# EAGLE board INKTIME_PCB (EAGLE 9.7.0)
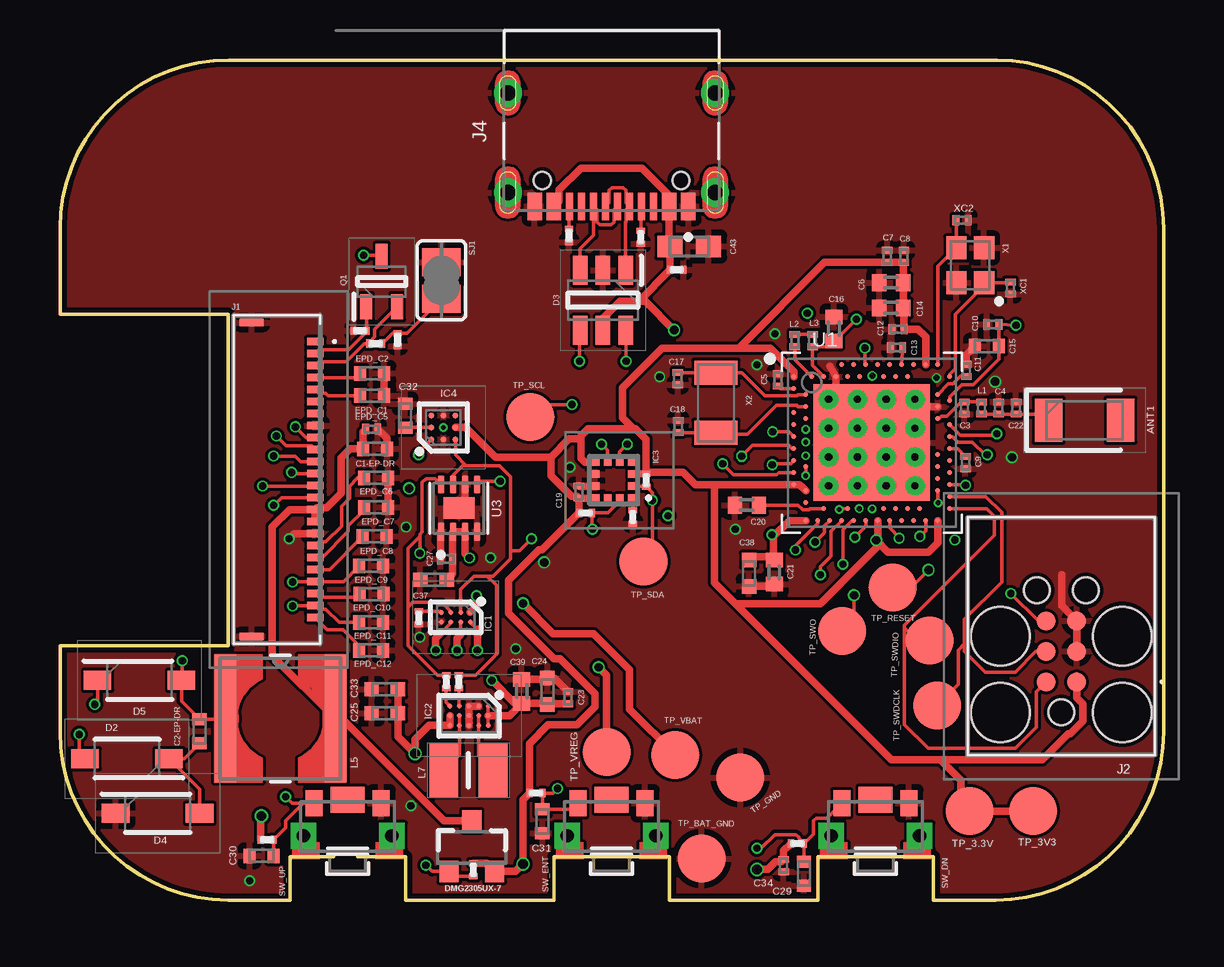
[diagram p0: board, top side]
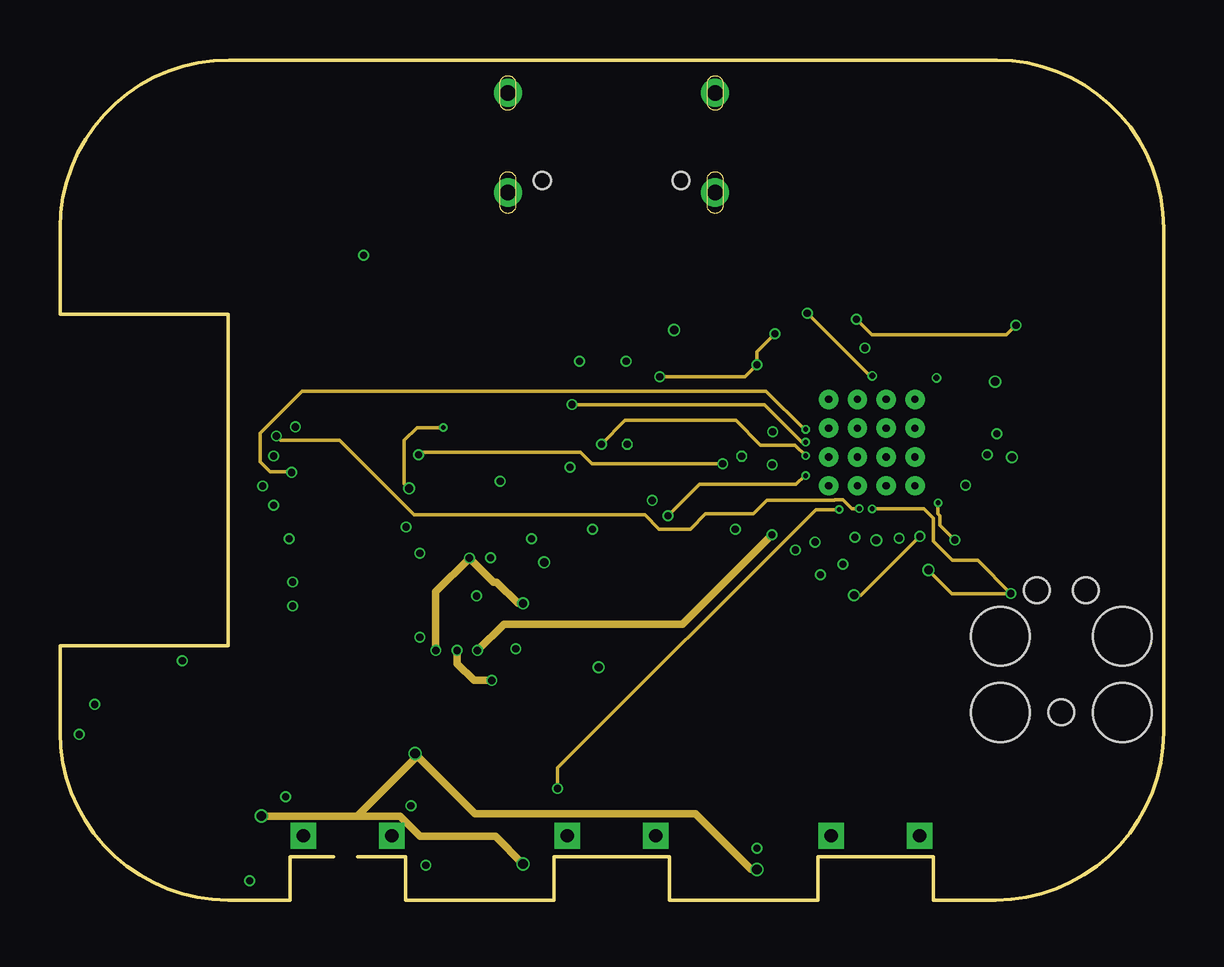
[diagram p1: board, inner layer Route2]
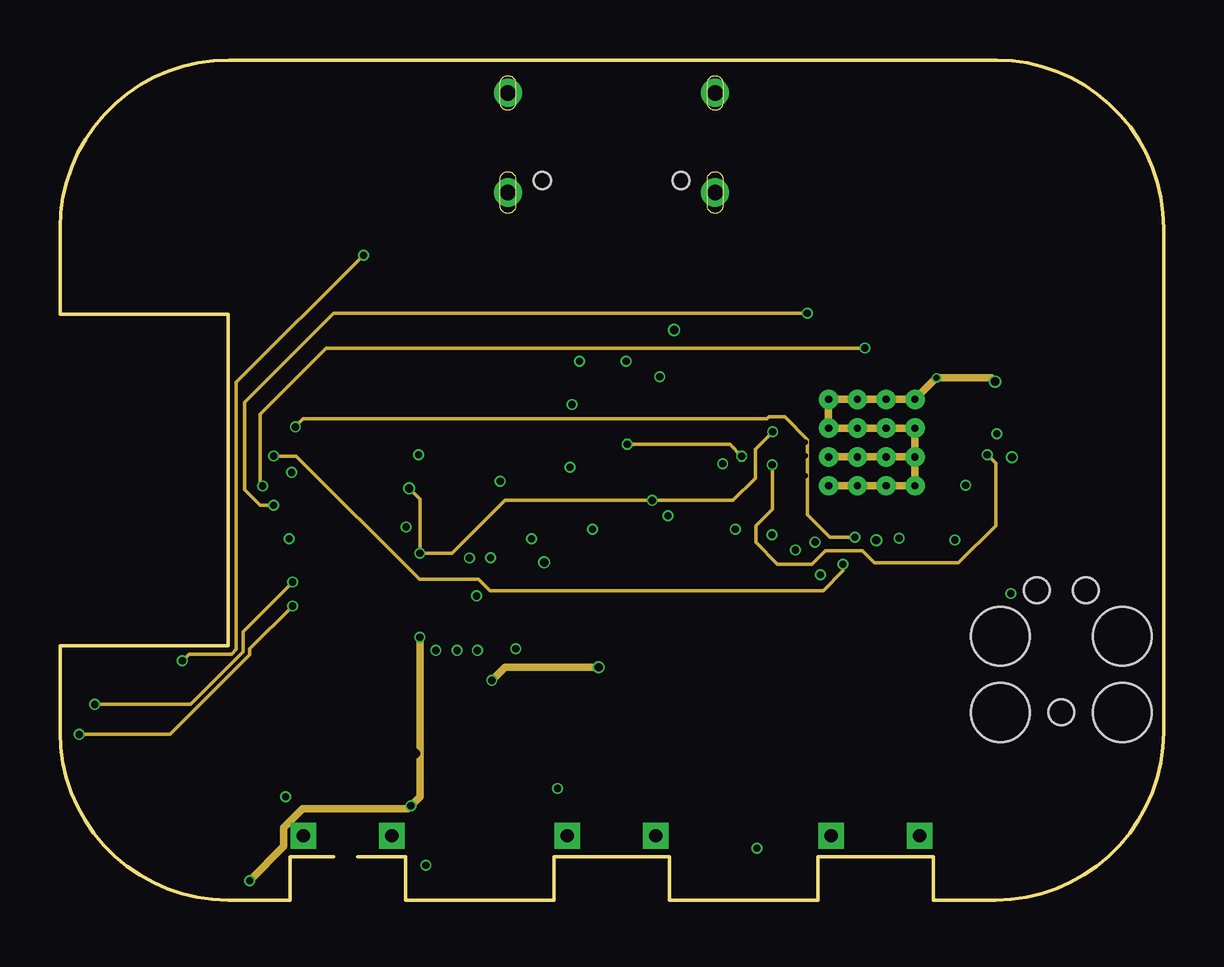
[diagram p2: board, inner layer Route15]
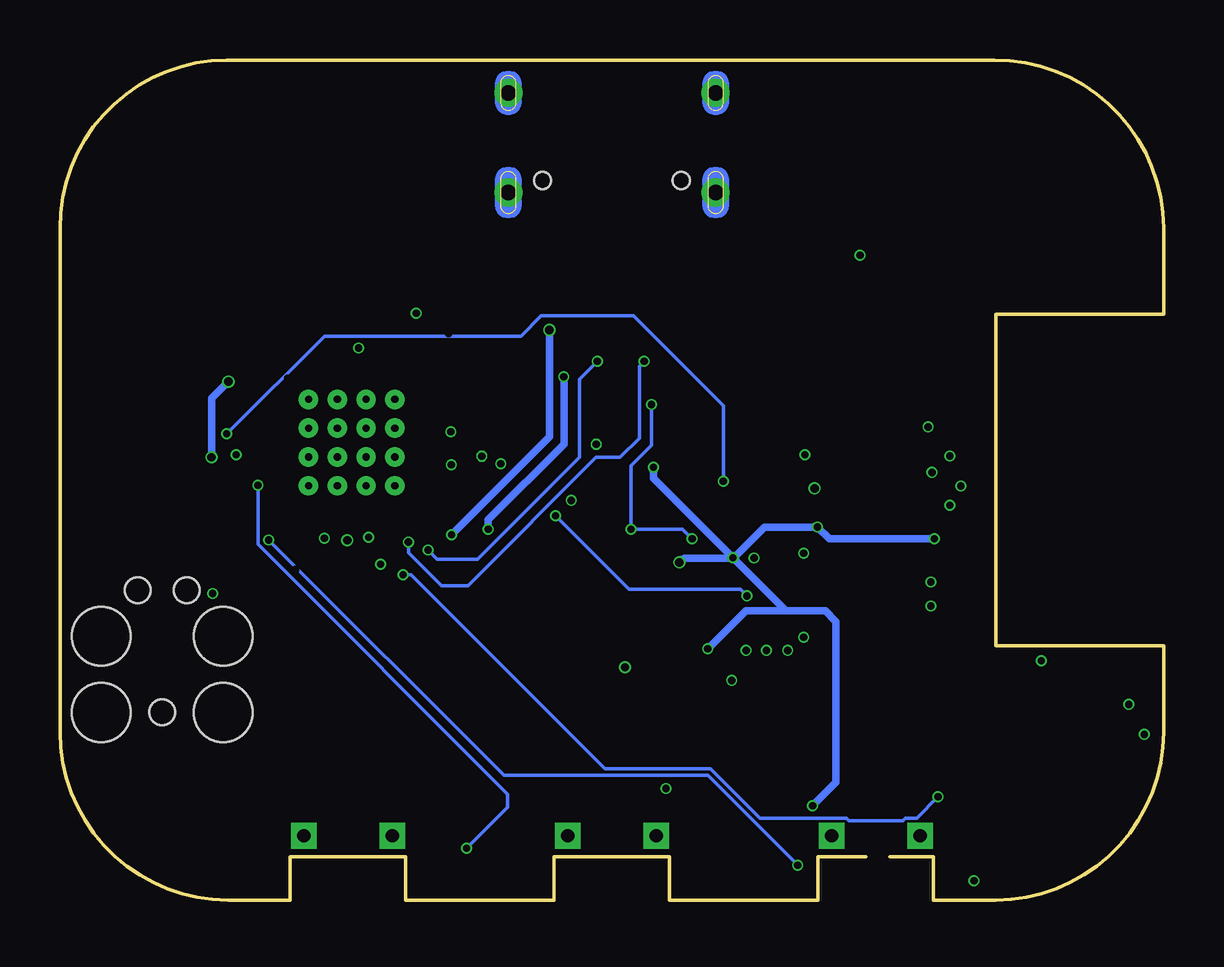
[diagram p3: board, bottom side, seen from below]

Size 46 x 35 mm. Coordinates in mm from the lower left corner, seen from the top.
Outline: 39,0 36.4,0 36.4,1.8 31.6,1.8 31.6,0 25.4,0 25.4,1.8 20.6,1.8 20.6,0 14.4,0 14.4,1.8 9.6,1.8 9.6,0 7,0 arc-90 0,7 0,10.6 7,10.6 7,24.4 0,24.4 0,28 arc-90 7.05,35 39.05,35 arc-90 46,28 46,7 arc-90 39,0
Copper layers (([2:1+(2*15)+16])): Top 0.035mm / dielectric 1.6mm / Route2 0.035mm / dielectric 0.15mm / Route15 0.035mm / dielectric 0.2mm / Bottom 0.035mm
Design rules "jlcpcb-2layers *": minimum track width 5mil, minimum drill 0.3mm, track to track 5mil, track to pad 5mil, pad to pad 5mil, via to via 5mil, smd to smd 5mil, copper to edge 0.2mm, drill to drill 6mil, minimum pad ring 10mil, minimum via ring 3mil, stop-mask expansion 4mil, vias tented up to drill 0mil, thermal gap 10mil

## Footprints (pad centres in the part's own frame; a part is rotated, then mirrored left to right if it is on the bottom)
2450AT18B100E_ANTC3216X140N = smd 1.15 x 1.8: 1 -1.5,0; 2 1.5,0
NORDIC_NRF_3_RESC0402_L = smd 0.5 x 0.6: 1 -0.5,0; 2 0.5,0
NORDIC_NRF_3_RESC0201_L = smd 0.28 x 0.43: 1 -0.255,0; 2 0.255,0
PERFECT_0402_0402 = smd 0.6 x 0.7: 1 -0.5,0; 2 0.5,0
NORDIC_NRF_3_RESC0402_N = smd 0.6 x 0.6: 1 -0.55,0; 2 0.55,0
GRM011R60J152KE01L_1_0201 = smd 0.35 x 0.25: 1 0,0.275; 2 0,-0.275
NORDIC_NRF_3_RESC0603_N = smd 1.05 x 0.9: 1 -0.8,0; 2 0.8,0
ESP32_C6_LIBRARY_5_SOD3716X135N = smd 1.15 x 0.8: 1 -1.75,0; 2 1.75,0
ESP32_C6_LIBRARY_3_SOT95P280X145-6N = smd 1.2 x 0.6: 1 -1.25,0.95; 2 -1.25,0; 3 -1.25,-0.95; 4 1.25,-0.95; 5 1.25,0; 6 1.25,0.95
ESP32_C6_LIBRARY_4_ESP32_C6_LIBRARY_4_ESP32_C6_LIBRARY_4_ESP32_C6_LIBRARY_4_ESP32_WROVER_SPARKFUN-DISCRETESEMI_SOT23-3 = smd 0.8 x 0.9: 1 -0.95,-1; 2 0.95,-1; 3 0,1.1
BQ25180YBGR_BGA8C40P2X4_100X155X50 = smd 0.2 x 0.2: A1 -0.2,0.6; A2 0.2,0.6; B1 -0.2,0.2; B2 0.2,0.2; C1 -0.2,-0.2; C2 0.2,-0.2; D1 -0.2,-0.6; D2 0.2,-0.6
RT6160AWSC_BGA15C40P3X5_140X230X60 = smd 0.216 x 0.216: A1 -0.4,0.8; A2 0,0.8; A3 0.4,0.8; B1 -0.4,0.4; B2 0,0.4; B3 0.4,0.4; C1 -0.4,0; C2 0,0; C3 0.4,0; D1 -0.4,-0.4; D2 0,-0.4; D3 0.4,-0.4; E1 -0.4,-0.8; E2 0,-0.8; E3 0.4,-0.8
BMA423_BMA423 = smd 0.3 x 0.35: 1 -0.75,-0.775; 2 -0.25,-0.775; 3 0.25,-0.775; 4 0.75,-0.775; 7 0.75,0.775; 8 0.25,0.775; 9 -0.25,0.775; 10 -0.75,0.775 | smd 0.35 x 0.3: 5 0.775,-0.25; 6 0.775,0.25; 11 -0.775,0.25; 12 -0.775,-0.25
DRV2605YZFR_BGA9C50P3X3_144X144X62 = smd 0.25 x 0.25: A1 -0.5,0.5; A2 0,0.5; A3 0.5,0.5; B1 -0.5,0; B2 0,0; B3 0.5,0; C1 -0.5,-0.5; C2 0,-0.5; C3 0.5,-0.5
503480-2400_5034802400 = smd 0.3 x 0.7: 1 -5.75,1.525; 2 -5.25,1.525; 3 -4.75,1.525; 4 -4.25,1.525; 5 -3.75,1.525; 6 -3.25,1.525; 7 -2.75,1.525; 8 -2.25,1.525; 9 -1.75,1.525; 10 -1.25,1.525; 11 -0.75,1.525; 12 -0.25,1.525; 13 0.25,1.525; 14 0.75,1.525; 15 1.25,1.525; 16 1.75,1.525; 17 2.25,1.525; 18 2.75,1.525; 19 3.25,1.525; 20 3.75,1.525; 21 4.25,1.525; 22 4.75,1.525; 23 5.25,1.525; 24 5.75,1.525 | smd 0.3 x 1: MP1 -6.54,-1.125; MP2 6.54,-1.125
TC2030-IDC_TC2030IDC = smd 0.783 x 0.783: 1 -0.953,-0.635; 2 -0.953,0.635; 3 0.317,-0.635; 4 0.317,0.635; 5 1.588,-0.635; 6 1.588,0.635 | hole 2.451: -2.223,-2.54; -2.223,2.54; 0.952,-2.54; 0.952,2.54 | hole 1.067: -2.223,0; 2.857,-1.016; 2.857,1.016
KH-TYPE-C-16P_KINGHELM_KH-TYPE-C-16P = smd 0.6 x 1.15: A1_B12 -3.2,4.725; A4_B9 -2.4,4.725; A9_B4 2.4,4.725; A12_B1 3.2,4.725 | smd 0.3 x 1.15: A5 -1.25,4.725; A6 -0.25,4.725; A7 0.25,4.725; A8 1.25,4.725; B5 1.75,4.725; B6 0.75,4.725; B7 -0.75,4.725; B8 -1.75,4.725 | drill 0.65 pad 1.05: SH1 -4.32,0; SH2 4.32,0; SH3 -4.32,4.15; SH4 4.32,4.15 | hole 0.7: -2.89,3.65; 2.89,3.65
NORDIC_NRF_2_RESC0201_L = smd 0.28 x 0.43: 1 -0.255,0; 2 0.255,0
ESP32_C6_LIBRARY_2_IND_4828-WE-TPC_WRE = smd 0.9 x 5.3: 1 -2.286,0; 2 2.286,0
MLP2016SR47MT0S1_INDC2016X100N = smd 1.2 x 2.2: 1 -1.028,0; 2 1.028,0
ESP32_C6_LIBRARY_6_SOT65P210X110-3N = smd 1.05 x 0.5: 1 -1.05,0.65; 2 -1.05,-0.65; 3 1.05,0
CPF0201D7K68C1_0201 = smd 0.35 x 0.25: 1 0,0.275; 2 0,-0.275
ESP32_C6_LIBRARY_7_JUMPER_SJ = smd 1.168 x 1.6: 1 -0.762,0; 2 0.762,0
2025-10-22_07-23-44_LIBRARY_SW_EVP-AKE31A_PAN = smd 0.711 x 1.092: 1 -1.4,-0.972; 2 1.4,-0.972 | drill 0.559 pad 0.914 square: 3 -1.848,0.381; 4 1.848,0.381 | smd 1.397 x 1.092: 5 0,-1.124
HECTOR_WATCH_1_TP20R = smd 2 x 2: TP 0,0
NORDIC_NRF_4_AQFN50P700X700X85_HS-74N = smd 4.85 x 4.85: P$74 0,0 | drill 0.3 pad 0.6: P$75 -1.8,1.8; P$76 -0.6,1.8; P$77 0.6,1.8; P$78 1.8,1.8; P$79 -1.8,0.6; P$80 -0.6,0.6; P$81 0.6,0.6; P$82 1.8,0.6; P$83 -1.8,-0.6; P$84 -0.6,-0.6; P$85 0.6,-0.6; P$86 1.8,-0.6; P$87 -1.8,-1.8; P$88 -0.6,-1.8; P$89 0.6,-1.8; P$90 1.8,-1.8 | smd 0.2 x 0.2: P$A8 -1.25,3.25; P$A10 -0.75,3.25; P$A12 -0.25,3.25; P$A14 0.25,3.25; P$A16 0.75,3.25; P$A18 1.25,3.25; P$A20 1.75,3.25; P$A22 2.25,3.25; P$A23 2.75,3.25; P$AA24 3.25,-2.25; P$AB2 -2.75,-2.5; P$AC5 -2,-2.75; P$AC9 -1,-2.75; P$AC11 -0.5,-2.75; P$AC13 0,-2.75; P$AC15 0.5,-2.75; P$AC17 1,-2.75; P$AC19 1.5,-2.75; P$AC21 2,-2.75; P$AC24 3.25,-2.75; P$AD2 -2.75,-3.25; P$AD4 -2.25,-3.25; P$AD6 -1.75,-3.25; P$AD8 -1.25,-3.25; P$AD10 -0.75,-3.25; P$AD12 -0.25,-3.25; P$AD14 0.25,-3.25; P$AD16 0.75,-3.25; P$AD18 1.25,-3.25; P$AD20 1.75,-3.25; P$AD22 2.25,-3.25; P$AD23 2.75,-3.25; P$B1 -3.25,2.75; P$B3 -2.5,2.75; P$B5 -2,2.75; P$B7 -1.5,2.75; P$B9 -1,2.75; P$B11 -0.5,2.75; P$B13 0,2.75; P$B15 0.5,2.75; P$B17 1,2.75; P$B19 1.5,2.75; P$B24 3.25,2.75; P$C1 -3.25,2.25; P$D2 -2.75,2; P$D23 2.75,2; P$E24 3.25,1.75; P$F2 -2.75,1.5; P$F23 2.75,1.5; P$G1 -3.25,1.25; P$H2 -2.75,1; P$H23 2.75,1; P$J1 -3.25,0.75; P$J24 3.25,0.75; P$K2 -2.75,0.5; P$L1 -3.25,0.25; P$L24 3.25,0.25; P$M2 -2.75,0; P$N1 -3.25,-0.25; P$N24 3.25,-0.25; P$P2 -2.75,-0.5; P$P23 2.75,-0.5; P$R1 -3.25,-0.75; P$R24 3.25,-0.75; P$T2 -2.75,-1; P$T23 2.75,-1; P$U1 -3.25,-1.25; P$U24 3.25,-1.25; P$V23 2.75,-1.5; P$W1 -3.25,-1.75; P$W24 3.25,-1.75; P$Y2 -2.75,-2; P$Y23 2.75,-2
ESP32_C6_LIBRARY_SON50P200X200X80-9N = smd 0.76 x 0.27: 1 -0.985,0.75; 2 -0.985,0.25; 3 -0.985,-0.25; 4 -0.985,-0.75; 5 0.985,-0.75; 6 0.985,-0.25; 7 0.985,0.25; 8 0.985,0.75 | smd 0.9 x 1.3: 9 0,0
NORDIC_NRF_BT-XTAL_2016_N = smd 0.95 x 0.85: 1 -0.725,-0.575; 2 0.725,-0.575; 3 0.725,0.575; 4 -0.725,0.575
NORDIC_NRF_1_XTAL_3215_N = smd 1 x 1.8: 1 -1.25,0; 2 1.25,0

## Placement (x,y rotation side)
ANT1  2450AT18B100E  [2450AT18B100E_ANTC3216X140N]  42.71,19.99 0 top
C1-EP-DR  10uF  [NORDIC_NRF_3_RESC0402_L]  13.13,18.8 180 top
C2-EP-DR  4.7uF/25V  [NORDIC_NRF_3_RESC0402_L]  5.82,7.03 270 top
C3  1pF  [NORDIC_NRF_3_RESC0201_L]  37.7,20.5 270 top
C4  1pF  [NORDIC_NRF_3_RESC0201_L]  39.12,20.5 90 top
C5  100nF  [NORDIC_NRF_3_RESC0201_L]  29.93,21.67 90 top
C6  4.7uF  [PERFECT_0402_0402]  34.65,25.72 180 top
C7  100nF  [NORDIC_NRF_3_RESC0201_L]  34.48,26.82 90 top
C8  100nF  [NORDIC_NRF_3_RESC0201_L]  35.18,26.82 90 top
C9  820pF  [NORDIC_NRF_3_RESC0201_L]  37.75,18.22 270 top
C10  N.C.  [NORDIC_NRF_3_RESC0201_L]  38.88,23.98 180 top
C11  100pF  [NORDIC_NRF_3_RESC0201_L]  37.78,22.07 90 top
C12  100nF  [NORDIC_NRF_3_RESC0201_L]  34.93,23.78 180 top
C13  N.C.  [NORDIC_NRF_3_RESC0201_L]  34.87,23.02 180 top
C14  4.7uF  [PERFECT_0402_0402]  34.65,24.67 180 top
C15  1uF  [NORDIC_NRF_3_RESC0402_L]  38.64,23.08 180 top
C16  47nF  [PERFECT_0402_0402]  32.26,23.8 90 top
C17  12pF  [NORDIC_NRF_3_RESC0201_L]  25.75,21.72 90 top
C18  12pF  [NORDIC_NRF_3_RESC0201_L]  25.77,19.73 270 top
C19  100nF  [NORDIC_NRF_3_RESC0201_L]  21.63,17 90 top
C20  4.7uF  [PERFECT_0402_0402]  28.63,16.45 180 top
C21  4.7uF  [PERFECT_0402_0402]  29.78,13.66 270 top
C22  N.C.  [NORDIC_NRF_3_RESC0201_L]  39.85,20.5 90 top
C23  0.1uF  [NORDIC_NRF_3_RESC0201_L]  21.18,8.43 270 top
C24  10uF  [NORDIC_NRF_3_RESC0402_N]  20.32,8.7 270 top
C25  22uF  [NORDIC_NRF_3_RESC0402_N]  13.54,7.78 180 top
C27  0.1uF  [NORDIC_NRF_3_RESC0201_L]  16.11,14.21 0 top
C29  1uF  [NORDIC_NRF_3_RESC0402_L]  31.01,1.09 90 top
C30  1uF  [NORDIC_NRF_3_RESC0402_L]  8.4,1.84 0 top
C31  1uF  [NORDIC_NRF_3_RESC0402_L]  20.11,3.28 90 top
C32  1uF  [NORDIC_NRF_3_RESC0402_L]  14.39,20.18 270 top
C33  22uF  [NORDIC_NRF_3_RESC0402_N]  13.54,8.78 180 top
C34  0.1uF  [NORDIC_NRF_3_RESC0201_L]  30.16,1.43 90 top
C37  1uF  [NORDIC_NRF_3_RESC0402_N]  15.57,13.34 0 top
C38  1uF  [NORDIC_NRF_3_RESC0402_N]  28.72,13.62 90 top
C39  10uF  [PERFECT_0402_0402]  19.24,8.69 90 top
C42  0.1uF  [GRM011R60J152KE01L_1_0201]  25.71,26.26 90 top
C43  4.7uF  [NORDIC_NRF_3_RESC0603_N]  26.23,27.23 0 top
D2  MBR0530  [ESP32_C6_LIBRARY_5_SOD3716X135N]  2.8,5.89 180 top
D3  USBLC6-2SC6Y  [ESP32_C6_LIBRARY_3_SOT95P280X145-6N]  22.63,24.99 270 top
D4  MBR0530  [ESP32_C6_LIBRARY_5_SOD3716X135N]  4.07,3.61 0 top
D5  MBR0530  [ESP32_C6_LIBRARY_5_SOD3716X135N]  3.32,9.16 0 top
DMG2305UX-7  20V/4.2A/52mΩ/1.4W  [ESP32_C6_LIBRARY_4_ESP32_C6_LIBRARY_4_ESP32_C6_LIBRARY_4_ESP32_C6_LIBRARY_4_ESP32_WROVER_SPARKFUN-DISCRETESEMI_SOT23-3]  17.17,2.19 0 top
EPD_C1  1uF/50V  [NORDIC_NRF_3_RESC0402_L]  13.02,21.02 180 top
EPD_C2  1uF/50V  [NORDIC_NRF_3_RESC0402_L]  13.02,21.94 180 top
EPD_C5  0.1uF/50V  [NORDIC_NRF_3_RESC0201_L]  12.99,19.62 180 top
EPD_C6  1uF/50V  [NORDIC_NRF_3_RESC0402_L]  13.17,17.59 180 top
EPD_C7  1uF/50V  [NORDIC_NRF_3_RESC0402_L]  13.17,16.36 180 top
EPD_C8  1uF/50V  [NORDIC_NRF_3_RESC0402_L]  13.12,15.15 180 top
EPD_C9  1uF/50V  [NORDIC_NRF_3_RESC0402_L]  12.97,13.92 180 top
EPD_C10  1uF/50V  [NORDIC_NRF_3_RESC0402_L]  12.98,12.75 180 top
EPD_C11  1uF/50V  [NORDIC_NRF_3_RESC0402_L]  12.97,11.57 180 top
EPD_C12  1uF/50V  [NORDIC_NRF_3_RESC0402_L]  12.97,10.4 180 top
IC1  BQ25180YBGR  [BQ25180YBGR_BGA8C40P2X4_100X155X50]  16.5,11.78 270 top
IC2  RT6160AWSC  [RT6160AWSC_BGA15C40P3X5_140X230X60]  17.05,7.68 270 top
IC3  BMA423  [BMA423_BMA423]  23.08,17.5 90 top
IC4  DRV2605YZFR  [DRV2605YZFR_BGA9C50P3X3_144X144X62]  15.98,19.69 90 top
J1  503480-2400  [503480-2400_5034802400]  9.12,17.52 270 top
J2  TC2030-IDC  [TC2030-IDC_TC2030IDC]  41.74,10.04 90 top
J4  KH-TYPE-C-16P  [KH-TYPE-C-16P_KINGHELM_KH-TYPE-C-16P]  22.99,33.63 180 top
L1  3.9nH  [NORDIC_NRF_2_RESC0201_L]  38.41,20.5 270 top
L2  10uH  [NORDIC_NRF_2_RESC0201_L]  30.63,23.31 90 top
L3  15nH  [NORDIC_NRF_2_RESC0201_L]  31.37,23.31 270 top
L5  68uH  [ESP32_C6_LIBRARY_2_IND_4828-WE-TPC_WRE]  9.19,7.56 0 top
L7  FTC252012SR47MBCA  [MLP2016SR47MT0S1_INDC2016X100N]  17.03,5.4 180 top
Q1  SI1308EDL-T1-GE3  [ESP32_C6_LIBRARY_6_SOT65P210X110-3N]  13.41,25.77 90 top
R1  0  [CPF0201D7K68C1_0201]  23.88,15.96 180 top
R1_EP_DR  0.47  [CPF0201D7K68C1_0201]  13.15,23.18 270 top
R1_USB  5K1  [CPF0201D7K68C1_0201]  24.21,27.61 180 top
R2  0  [CPF0201D7K68C1_0201]  16.1,9.09 0 top
R2_EP_DR  10K  [CPF0201D7K68C1_0201]  12.51,23.72 90 top
R2_USB  5K1  [CPF0201D7K68C1_0201]  21.22,27.69 0 top
R4  0  [CPF0201D7K68C1_0201]  16.63,9.09 0 top
R5  10K  [CPF0201D7K68C1_0201]  8.64,2.51 270 top
R7  10K  [CPF0201D7K68C1_0201]  30.74,2.35 270 top
R8  10K  [CPF0201D7K68C1_0201]  19.84,4.45 270 top
R9  10K  [CPF0201D7K68C1_0201]  14.96,11.76 180 top
R17  3K3  [CPF0201D7K68C1_0201]  21.91,16.13 90 top
R18  3K3  [CPF0201D7K68C1_0201]  24.44,17.49 0 top
R_PWR_EPD  10K  [CPF0201D7K68C1_0201]  17.23,1.26 180 top
R_TYPE_SEL  2.2  [CPF0201D7K68C1_0201]  14.07,23.35 180 top
SJ1  0  [ESP32_C6_LIBRARY_7_JUMPER_SJ]  15.9,25.82 270 top
SW_DN  2025-10-22_07-23-44_LIBRARY_EVP-AKE31ASW_EVP-AKE31A_PAN  [2025-10-22_07-23-44_LIBRARY_SW_EVP-AKE31A_PAN]  33.99,3.06 180 top
SW_ENT  2025-10-22_07-23-44_LIBRARY_EVP-AKE31ASW_EVP-AKE31A_PAN  [2025-10-22_07-23-44_LIBRARY_SW_EVP-AKE31A_PAN]  22.99,3.06 180 top
SW_UP  2025-10-22_07-23-44_LIBRARY_EVP-AKE31ASW_EVP-AKE31A_PAN  [2025-10-22_07-23-44_LIBRARY_SW_EVP-AKE31A_PAN]  11.99,3.06 180 top
TP_3.3V  HECTOR_WATCH_1_TPTP20R  [HECTOR_WATCH_1_TP20R]  37.91,3.7 0 top
TP_3V3  HECTOR_WATCH_1_TPTP20R  [HECTOR_WATCH_1_TP20R]  40.57,3.71 0 top
TP_BAT_GND  HECTOR_WATCH_1_TPTP20R  [HECTOR_WATCH_1_TP20R]  26.74,1.72 90 top
TP_GND  HECTOR_WATCH_1_TPTP20R  [HECTOR_WATCH_1_TP20R]  28.36,5.1 0 top
TP_RESET  HECTOR_WATCH_1_TPTP20R  [HECTOR_WATCH_1_TP20R]  34.7,13.02 0 top
TP_SCL  HECTOR_WATCH_1_TPTP20R  [HECTOR_WATCH_1_TP20R]  19.61,20.13 0 top
TP_SDA  HECTOR_WATCH_1_TPTP20R  [HECTOR_WATCH_1_TP20R]  24.32,14.1 0 top
TP_SWDCLK  HECTOR_WATCH_1_TPTP20R  [HECTOR_WATCH_1_TP20R]  36.56,8.11 0 top
TP_SWDIO  HECTOR_WATCH_1_TPTP20R  [HECTOR_WATCH_1_TP20R]  36.24,10.82 0 top
TP_SWO  HECTOR_WATCH_1_TPTP20R  [HECTOR_WATCH_1_TP20R]  32.61,11.2 0 top
TP_VBAT  HECTOR_WATCH_1_TPTP20R  [HECTOR_WATCH_1_TP20R]  25.65,6.04 180 top
TP_VREG  HECTOR_WATCH_1_TPTP20R  [HECTOR_WATCH_1_TP20R]  22.79,6.17 0 top
U1  NRF52840_QF  [NORDIC_NRF_4_AQFN50P700X700X85_HS-74N]  33.84,19.06 0 top
U3  MAX17048G+T10  [ESP32_C6_LIBRARY_SON50P200X200X80-9N]  16.63,16.33 90 top
X1  32MHz  [NORDIC_NRF_BT-XTAL_2016_N]  37.94,26.45 90 top
X2  32.768kHz  [NORDIC_NRF_1_XTAL_3215_N]  27.34,20.72 270 top
XC1  12pF  [NORDIC_NRF_3_RESC0201_L]  39.62,25.5 270 top
XC2  12pF  [NORDIC_NRF_3_RESC0201_L]  37.6,28.32 0 top

## Library data of the parts
ANT1 = InkTime_v5v3; ARROW_PART_NUMBER: 2450AT18B100E; ARROW_PRICE-STOCK: https://www.arrow.com/en/products/2450at18b100e/johanson-dielectrics?utm_currency=USD&region=nac; DESCRIPTION: Antennas 2.45GHz ANTENNA; HEIGHT: 1.4mm; MANUFACTURER_NAME: JOHANSON TECHNOLOGY; MANUFACTURER_PART_NUMBER: 2450AT18B100E; MOUSER_PART_NUMBER: 609-2450AT18B100E; MOUSER_PRICE-STOCK: https://www.mouser.co.uk/ProductDetail/Johanson-Technology/2450AT18B100E?qs=yCnrNFeXz%252Bh5MFsFIXGZGA%3D%3D
C1-EP-DR C2-EP-DR C3-C25 C27 C29-C34 C37-C39 C42 C43 EPD_C1 EPD_C2 EPD_C5-EPD_C12 L1-L3 R1 R1_EP_DR R1_USB R2 R2_EP_DR R2_USB R4 R5 R7-R9 R17 R18 R_PWR_EPD R_TYPE_SEL SJ1 TP_3.3V TP_3V3 TP_BAT_GND TP_GND TP_RESET TP_SCL TP_SDA TP_SWDCLK TP_SWDIO TP_SWO TP_VBAT TP_VREG U1 X1 X2 XC1 XC2 = InkTime_v5v3
D2 D4 D5 = InkTime_v5v3; AVAILABILITY: In Stock; CHECK_PRICES: https://www.snapeda.com/parts/MBR0530/Onsemi/view-part/?ref=eda; DESCRIPTION: Diode Schottky 30 V 500mA Surface Mount SOD-123; MF: ON Semiconductor; MP: MBR0530; PACKAGE: SOD-123-2 ON Semiconductor; PRICE: None; PURCHASE-URL: https://www.snapeda.com/api/url_track_click_mouser/?unipart_id=179458&manufacturer=ON Semiconductor&part_name=MBR0530&search_term=None; SNAPEDA_LINK: https://www.snapeda.com/parts/MBR0530/Onsemi/view-part/?ref=snap
D3 = InkTime_v5v3; AVAILABILITY: In Stock; CHECK_PRICES: https://www.snapeda.com/parts/USBLC6-2SC6Y/STMicroelectronics/view-part/?ref=eda; DESCRIPTION: 17V Clamp 5A (8/20µs) Ipp Tvs Diode Surface Mount SOT-23-6; MF: STMicroelectronics; MP: USBLC6-2SC6Y; PACKAGE: SOT-23-6 STMicroelectronics; PRICE: None; SNAPEDA_LINK: https://www.snapeda.com/parts/USBLC6-2SC6Y/STMicroelectronics/view-part/?ref=snap
DMG2305UX-7 = InkTime_v5v3; PROD_ID: TRAN-14388
IC1 = InkTime_v5v3; ARROW_PART_NUMBER: BQ25180YBGR; ARROW_PRICE-STOCK: https://www.arrow.com/en/products/bq25180ybgr/texas-instruments?utm_currency=USD&region=nac; DESCRIPTION: Charger IC Lithium Ion/Polymer, Lithium Iron Phosphate 8-DSBGA (1.6x1.1); HEIGHT: 0.5mm; MANUFACTURER_NAME: Texas Instruments; MANUFACTURER_PART_NUMBER: BQ25180YBGR; MOUSER_PART_NUMBER: 595-BQ25180YBGR; MOUSER_PRICE-STOCK: https://www.mouser.co.uk/ProductDetail/Texas-Instruments/BQ25180YBGR?qs=doiCPypUmgEWjAK%252BJAX6Tw%3D%3D
IC2 = InkTime_v5v3; DESCRIPTION: Buck-Boost Regulator Positive Output Step-Up/Step-Down I2C DC-DC Controller IC 15-WL-CSP (BSC) (1.4x2.3); HEIGHT: 0.6mm; MANUFACTURER_NAME: RICHTEK; MANUFACTURER_PART_NUMBER: RT6160AWSC; MOUSER_PART_NUMBER: 835-RT6160AWSC; MOUSER_PRICE-STOCK: https://www.mouser.co.uk/ProductDetail/Richtek/RT6160AWSC?qs=amGC7iS6iy%2FLd9PSoixZXQ%3D%3D
IC3 = InkTime_v5v3; ARROW_PART_NUMBER: BMA423; ARROW_PRICE-STOCK: https://www.arrow.com/en/products/bma423/bosch; DESCRIPTION: Accelerometers Triaxial low-g 12bit Acceleration Sensor; HEIGHT: 1mm; MANUFACTURER_NAME: BOSCH; MANUFACTURER_PART_NUMBER: BMA423; MOUSER_PART_NUMBER: 262-BMA423; MOUSER_PRICE-STOCK: https://www.mouser.co.uk/ProductDetail/Bosch-Sensortec/BMA423?qs=HXFqYaX1Q2xC%252BSgeGoX3mg%3D%3D
IC4 = InkTime_v5v3; ARROW_PART_NUMBER: DRV2605YZFR; ARROW_PRICE-STOCK: https://www.arrow.com/en/products/drv2605yzfr/texas-instruments?region=nac; DESCRIPTION: Haptic Driver for ERM/LRA with Built-In Library and Smart Loop Architecture; HEIGHT: 0.625mm; MANUFACTURER_NAME: Texas Instruments; MANUFACTURER_PART_NUMBER: DRV2605YZFR
J1 = InkTime_v5v3; DESCRIPTION: FFC & FPC Connectors 0.5mm FPC RA SMT Dual Contact 24Ckt; HEIGHT: 1.87mm; MANUFACTURER_NAME: Molex; MANUFACTURER_PART_NUMBER: 503480-2400; MOUSER_PART_NUMBER: 538-503480-2400; MOUSER_PRICE-STOCK: https://www.mouser.co.uk/ProductDetail/Molex/503480-2400?qs=OAhjpuo3Vu7efIoxFh9AOw%3D%3D
J2 = InkTime_v5v3; DESCRIPTION: CABLE ADAPTER 6 POS; HEIGHT: 19mm; MANUFACTURER_NAME: Tag Connect; MANUFACTURER_PART_NUMBER: TC2030-IDC
J4 = InkTime_v5v3; AVAILABILITY: Not in stock; CHECK_PRICES: https://www.snapeda.com/parts/KH-TYPE-C-16P/Kinghelm/view-part/?ref=eda; MF: kinghelm; MP: KH-TYPE-C-16P; PACKAGE: None; PRICE: None; SNAPEDA_LINK: https://www.snapeda.com/parts/KH-TYPE-C-16P/Kinghelm/view-part/?ref=snap
L5 = InkTime_v5v3; COPYRIGHT: Copyright (C) 2024 Ultra Librarian. All rights reserved.; MANUFACTURER_PART_NUMBER: 744043680; MFR_NAME: Wurth Electronics
L7 = InkTime_v5v3; DESCRIPTION: SMD / SMT Inductors (Coils), L=0.47?H, L x W x T :; HEIGHT: 1mm; JLCPCB: https://jlcpcb.com/partdetail/6763488-FTC252012SR47MBCA/C5832368; MANUFACTURER_NAME: TDK; MANUFACTURER_PART_NUMBER: FTC252012SR47MBCA
Q1 = InkTime_v5v3; AVAILABILITY: In Stock; CHECK_PRICES: https://www.snapeda.com/parts/SI1308EDL-T1-GE3/Vishay+Siliconix/view-part/?ref=eda; DESCRIPTION: Si1308EDL-T1-GE3 N-channel MOSFET Transistor, 1.5 A, 30 V, 3-Pin SC-70 | Siliconix / Vishay SI1308EDL-T1-GE3; MF: Vishay Siliconix; MP: SI1308EDL-T1-GE3; PACKAGE: SOT-323 Vishay Semiconductor; PRICE: None; PURCHASE-URL: https://www.snapeda.com/api/url_track_click_mouser/?unipart_id=274603&manufacturer=Vishay Siliconix&part_name=SI1308EDL-T1-GE3&search_term=None; SNAPEDA_LINK: https://www.snapeda.com/parts/SI1308EDL-T1-GE3/Vishay+Siliconix/view-part/?ref=snap
SW_DN SW_ENT SW_UP = InkTime_v5v3; COPYRIGHT: Copyright (C) 2025 Ultra Librarian. All rights reserved.; DIGI-KEY_PART_NUMBER_1: P123437TR-ND; DIGI-KEY_PART_NUMBER_2: P123437CT-ND; DIGI-KEY_PART_NUMBER_3: P123437DKR-ND; MANUFACTURER_NAME: Panasonic; MANUFACTURER_PART_NUMBER: EVP-AKE31A
U3 = InkTime_v5v3; AVAILABILITY: In Stock; CHECK_PRICES: https://www.snapeda.com/parts/MAX17048G+T10/Analog+Devices/view-part/?ref=eda; DESCRIPTION: 3µA 1-Cell/2-Cell Fuel Gauge with ModelGauge; MF: Analog Devices; MP: MAX17048G+T10; PACKAGE: TDFN-8 Maxim; PRICE: None; PURCHASE-URL: https://www.snapeda.com/api/url_track_click_mouser/?unipart_id=329239&manufacturer=Analog Devices&part_name=MAX17048G+T10&search_term=None; SNAPEDA_LINK: https://www.snapeda.com/parts/MAX17048G+T10/Analog+Devices/view-part/?ref=snap

## Nets
3V3: C6.1 C7.1 C8.1 C12.1 C14.1 C19.1 C25.1 C33.1 C34.2 DMG2305UX-7.2 IC2.E2 IC2.E3 IC3.3 IC3.7 IC3.10 IC4.C2 J2.1 R5.2 R7.2 R8.2 R17.1 R18.1 R_PWR_EPD.2 TP_3.3V.TP TP_3V3.TP U1.P$A22 U1.P$AD14 U1.P$AD23 U1.P$B1 U1.P$W1 U1.P$Y2
ALERT: U1.P$J24 U3.5
D+: D3.4 U1.P$AD6
D-: D3.6 U1.P$AD4
DN: D3.1 J4.A7 J4.B7
DP: D3.3 J4.A6 J4.B6
EPD_3V3: C1-EP-DR.2 DMG2305UX-7.3 EPD_C5.2 J1.15 J1.16 L5.2
EPD_BUSY: J1.9 U1.P$AD12
EPD_CS: J1.12 U1.P$K2
EPD_DC: J1.11 U1.P$AD10
EPD_RST: J1.10 U1.P$AC11
GDR: J1.2 Q1.1 R2_EP_DR.2
GND: C1-EP-DR.1 C3.2 C4.2 C5.2 C6.2 C7.2 C8.2 C9.2 C10.2 C11.2 C12.2 C13.2 C14.2 C15.2 C16.2 C17.1 C18.1 C19.2 C20.2 C21.2 C22.2 C23.1 C24.1 C25.2 C27.1 C29.1 C30.1 C31.1 C32.1 C33.2 C34.1 C37.1 C38.1 C39.2 C42.2 C43.2 D3.2 D4.1 EPD_C1.1 EPD_C2.1 EPD_C5.1 EPD_C6.1 EPD_C7.1 EPD_C8.1 EPD_C9.1 EPD_C10.1 EPD_C11.1 EPD_C12.1 IC1.D2 IC2.B1 IC2.C1 IC2.C2 IC2.C3 IC3.8 IC3.9 IC4.B1 IC4.B3 J1.8 J1.17 J1.MP1 J1.MP2 J2.3 J2.5 J4.A1_B12 J4.A12_B1 J4.SH1 J4.SH2 J4.SH3 J4.SH4 R1.1 R1_USB.1 R2_EP_DR.1 R2_USB.2 R9.1 R_TYPE_SEL.1 SJ1.1 SW_DN.1 SW_ENT.1 SW_UP.1 TP_BAT_GND.TP TP_GND.TP U1.P$74 U1.P$75 U1.P$76 U1.P$77 U1.P$78 U1.P$79 U1.P$80 U1.P$81 U1.P$82 U1.P$83 U1.P$84 U1.P$85 U1.P$86 U1.P$87 U1.P$88 U1.P$89 U1.P$90 U1.P$B7 U1.P$F23 U3.1 U3.4 U3.6 U3.9 X1.2 X1.4 XC1.2 XC2.2
HAPTIC_EN: IC4.A1 U1.P$U1
IMU_INT1: IC3.5 U1.P$N1
IMU_INT2: IC3.6 U1.P$P2
LX1: IC2.B2 IC2.B3 L7.1
LX2: IC2.D2 IC2.D3 L7.2
MOSI: J1.14 U1.P$B13
N$1: IC2.D1 R4.2
N$2: IC1.D1 R9.2
N$3: IC2.E1 R2.2
N$4: U1.P$B24 X1.1 XC1.1
N$5: U1.P$A23 X1.3 XC2.1
N$6: C10.1 C15.1 C16.1 L3.2 U1.P$B5 U1.P$E24
N$7: IC3.1 R1.2
N$8: L2.2 L3.1
N$9: C13.1 U1.P$A18
N$10: L2.1 U1.P$B3
N$12: C32.2 IC4.A2
N$13: C5.1 U1.P$C1
N$14: EPD_C6.2 J1.18
N$15: C9.1 U1.P$N24
N$16: C17.2 U1.P$D2 X2.1
N$17: C18.2 U1.P$F2 X2.2
N$18: C20.1 U1.P$AC5
N$19: C3.1 L1.1 U1.P$H23
N$20: EPD_C12.2 J1.24
N$21: EPD_C2.2 J1.4
N$22: C11.1 U1.P$D23
N$23: J4.B5 R2_USB.1
N$24: J4.A5 R1_USB.2
N$25: EPD_C1.2 J1.5
N$27: EPD_C10.2 J1.22
N$29: EPD_C8.2 J1.20
N$30: EPD_C7.2 J1.19
N$31: R1_EP_DR.1 R_TYPE_SEL.2 SJ1.2
N$33: C2-EP-DR.1 D5.2 L5.1 Q1.3
N$34: C2-EP-DR.2 D2.1 D4.2
OUT+: IC4.A3
OUT-: IC4.C3
P0.04: U1.P$J1
P0.13: C30.2 R5.1 SW_UP.2 U1.P$AD8
P0.14: C31.2 R8.1 SW_ENT.2 U1.P$AC9
P0.19: U1.P$AC15
P0.20: U1.P$AD16
P0.21: U1.P$AC17
P0.22: U1.P$AD18
P0.23: U1.P$AC19
P0.24: U1.P$AD20
P0.25: U1.P$AC21
P0.26: U1.P$G1
P0.27: U1.P$H2
P0.28: U1.P$B11
P0.29: U1.P$A10
P0.30: U1.P$B9
P0.31: U1.P$A8
P1.01: DMG2305UX-7.1 R_PWR_EPD.1 U1.P$Y23
P1.02: C29.2 R7.1 SW_DN.2 U1.P$W24
P1.03: U1.P$V23
P1.04: U1.P$U24
P1.05: U1.P$T23
P1.06: U1.P$R24
P1.07: U1.P$P23
P1.09: U1.P$L24 U1.P$R1
P1.10: U1.P$A20
P1.11: U1.P$B19
P1.12: U1.P$B17
P1.13: U1.P$A16
P1.14: U1.P$B15
P1.15: U1.P$A14
PMIC_INT: IC1.A1 U1.P$T2
PREGVH: D5.1 EPD_C9.2 J1.21
PREVGL: D2.2 EPD_C11.2 J1.23
RESE: J1.3 Q1.2 R1_EP_DR.2
RESET: J2.6 TP_RESET.TP U1.P$AC13
RF: ANT1.1 C4.1 C22.1 L1.2
SCK: J1.13 U1.P$A12
SCL: IC1.B1 IC3.12 IC4.C1 R4.1 R17.2 TP_SCL.TP U1.P$M2 U3.7
SDA: IC1.C1 IC3.2 IC4.B2 R2.1 R18.2 TP_SDA.TP U1.P$L1 U3.8
SWDCLK: J2.4 TP_SWDCLK.TP U1.P$AA24
SWDIO: J2.2 TP_SWDIO.TP U1.P$AC24
SWO: TP_SWO.TP U1.P$AD22
VBAT: C27.2 C37.2 IC1.C2 TP_VBAT.TP U3.2 U3.3
VBUS: C21.1 C38.2 C42.1 C43.1 D3.5 IC1.A2 J4.A4_B9 J4.A9_B4 U1.P$AD2
VREG: C23.2 C24.2 C39.1 IC1.B2 IC2.A1 IC2.A2 IC2.A3 TP_VREG.TP

## Tracks (layer width: path | path; a pad name or v marks a point on that pad's centre or on a via)
3V3  (via drill 0.35, 0.4 layers 1-2)
  Top 0.305: IC2.E2 IC2.E3 15.38,7.28 14.8,6.7 v14.8,6.1 14.09,6.81 C25.1 C33.1 | v8.4,3.5 8.37,3.46 R5.2 | R7.2 30.16,2.04 C34.2 30.07,1.59 29.83,1.59 29.51,1.27 v29.05,1.27 | IC3.10 C19.1 | C19.1 R17.1 20.1,14.6 19.96,14.6 18.7,13.33 18.7,11.95 20.6,10.05 20.85,10.05 22.3,8.6 22.3,8.05 21.55,7.3 20.35,7.3 19.57,6.52 R8.2 19.3,4.19 v19.3,1.5 18.99,1.19 DMG2305UX-7.2 17.78,1.54 R_PWR_EPD.2 | U1.P$AD23 36.59,14.89 36.2,14.5 34.52,14.5 v34.02,14.99 | IC3.3 23.87,17.77 R18.1 | 27.28,17.31 U1.P$W1 30.81,17.31 30.9,17.23 30.92,17.23 U1.P$Y2 | 27.28,17.31 26.48,17.31 25.98,17.82 24.49,17.82 R18.1 | R18.1 24.44,19.2 23.98,19.64 23.9,19.64 | 23.9,19.64 22.02,19.64 21.72,19.34 21.72,19.21 | 21.72,19.21 21.72,18.41 21.88,18.25 IC3.7 | C19.1 21.56,16.82 21.32,16.82 20.46,17.67 20.46,18.45 | 20.46,18.45 18.16,18.45 16.91,19.69 IC4.C2 | 20.46,18.45 21.23,19.21 21.72,19.21 | 23.9,19.64 23.45,20.09 23.45,21.35 25.1,23 28.3,23 | U1.P$B1 30.59,22.02 29.61,23 28.3,23 | U1.P$A22 36.09,23.46 35.77,23.78 C12.1 35.19,24.63 C14.1 C6.1 35.15,26.54 C8.1 C7.1 31.87,26.56 28.3,23 | 28.15,12.35 27.28,13.22 27.28,17.31 | J2.1 42.38,8.44 42.63,8.18 42.63,7.45 42.11,6.93 42.03,6.93 40.95,5.85 36.7,5.85 | 36.7,5.85 34.65,5.85 28.15,12.35 | TP_3V3.TP TP_3.3V.TP 37.56,4.05 37.56,4.99 36.7,5.85 | 28.15,12.35 31.71,12.35 34.02,14.67 v34.02,14.99 | U1.P$AD14 34.09,15.05 v34.02,14.99
  Route2 0.305: 12.39,3.49 8.41,3.49 v8.4,3.5 | 12.39,3.49 14.8,5.9 v14.8,6.1 17.3,3.6 26.48,3.6 28.81,1.27 v29.05,1.27 | 12.39,3.49 14.17,3.49 15.01,2.65 18.15,2.65 v19.3,1.5
ALERT  (via drill 0.3)
  Top 0.152: U1.P$J24 37.54,19.36 38.98,19.36 v39.05,19.43 | U3.5 17.52,17.45 v18.35,17.45
  Bottom 0.15: v18.35,17.45 18.35,20.6 22.1,24.35 25.94,24.35 26.79,23.5 34.97,23.5 v39.05,19.43
D+  (via drill 0.3)
  Top 0.15: D3.4 21.65,23.71 v21.65,22.45 | U1.P$AD6 31.87,15.59 31.87,15.48 31.86,15.47 31.86,15.3 v31.48,14.91
  Bottom 0.15: v21.65,22.45 21.85,22.25 21.85,19.25 22.65,18.45 23.65,18.45 29,13.1 30.1,13.1 31.48,14.48 v31.48,14.91
D-  (via drill 0.3)
  Top 0.15: D3.6 23.6,23.72 v23.6,22.45 | U1.P$AD4 31.59,15.69 30.66,14.76 v30.66,14.59
  Bottom 0.15: v30.66,14.59 30.27,14.2 28.6,14.2 24.35,18.45 24.35,21.7 v23.6,22.45
DN
  Top 0.152: D3.1 23.58,28.23 23.59,28.24 23.59,28.76 J4.B7 23.59,29.05 23.59,29.56 23.47,29.68 23.01,29.68 22.89,29.56 22.89,29.05 J4.A7
DP
  Top 0.152: D3.3 21.68,27.13 22.24,27.69 J4.B6 22.39,28.76 22.39,28.24 22.51,28.13 22.97,28.13 23.09,28.24 23.09,28.76 J4.A6
EPD_3V3
  Top 0.305: J1.16 J1.15 | J1.15 10.71,16.34 11.11,16.34 11.71,16.94 11.71,18.43 12.09,18.8 C1-EP-DR.2 12.63,19.52 EPD_C5.2 | J1.15 9.57,16.27 8.85,15.55 8.85,10.19 L5.2 11.75,7.56 16.02,3.29 DMG2305UX-7.3
EPD_BUSY  (via drill 0.3)
  Top 0.15: J1.9 10.25,19.27 v9.81,19.71 | v33.13,15.12 33.59,15.57 U1.P$AD12
  Route15 0.15: v9.81,19.71 10.15,20.05 29.46,20.05 29.55,20.13 30.21,20.13 31.16,19.18 31.16,16.05 32.09,15.12 v33.13,15.12
EPD_CS  (via drill 0.2 pad 0.25 layers 1-2, 0.3)
  Top 0.15: J1.12 9.7,17.77 v9.65,17.82 | U1.P$K2 v31.09,19.61
  Route2 0.15: v9.65,17.82 9.62,17.85 8.77,17.85 8.35,18.27 8.35,19.45 10.1,21.2 29.44,21.2 31.02,19.61 v31.09,19.61
EPD_DC  (via drill 0.3)
  Top 0.15: U1.P$AD10 33.02,15.81 32.63,15.42 32.63,14.38 32.64,14.38 v32.64,13.99 | J1.11 10.03,18.27 9.8,18.5 v8.91,18.5
  Route15 0.15: v8.91,18.5 9.85,18.5 14.99,13.37 17.45,13.37 17.92,12.9 31.82,12.9 32.64,13.71 v32.64,13.99
EPD_RST  (via drill 0.2 layers 1-2, 0.3 layers 1-2)
  Top 0.15: U1.P$AC11 v33.32,16.31 | J1.10 10.49,18.92 9.44,18.92 v9.02,19.33
  Route2 0.15: v33.32,16.31 33.01,16.31 32.64,16.67 32.31,16.67 32.29,16.65 29.47,16.65 28.91,16.09 26.91,16.09 26.28,15.46 24.96,15.46 24.38,16.05 14.77,16.05 11.66,19.16 9.2,19.16 v9.02,19.33
GDR
  Top 0.152: J1.2 10.79,22.92 12.02,22.92 12.79,23.68 R2_EP_DR.2 12.79,24.69 Q1.1
GND  (via drill 0.25 layers 1-15, 0.3, 0.3 layers 1-2, 0.35)
  Top 0.305: IC2.B1 IC2.C1 IC2.C2 IC2.C3 | EPD_C2.1 EPD_C1.1 | J1.17 9.77,15.27 v9.55,15.05 | U1.P$74 U1.P$80 | U3.6 16.88,16.58 U3.9 | IC3.9 C19.2 | EPD_C5.1 13.63,19.23 C1-EP-DR.1 | 32.1,22.25 U1.P$B7 32.34,21.16 U1.P$75 | C15.2 37.78,22.72 C11.2 | U3.1 15.86,15.32 C27.1 | C21.2 29.69,13.07 C38.1 | U1.P$F23 35.94,20.56 U1.P$78 | J2.3 J2.5 41.75,12.25 41.75,13.55 | C39.2 20.26,9.19 C24.1 20.62,9.25 C23.1 | EPD_C6.1 EPD_C7.1
  Route2 0.15: v29.8,23.6 29.05,22.85 v29.05,22.3 28.55,21.8 v25,21.8
  Route15 0.305: v7.9,0.8 9.33,2.23 9.33,3.01 10.12,3.8 14.5,3.8 v14.63,3.93 15,4.3 v15,10.95 | v38.98,21.6 38.83,21.75 v36.53,21.75 U1.P$78 U1.P$77 U1.P$76 U1.P$75 U1.P$79 U1.P$80 U1.P$81 U1.P$82 U1.P$86 | U1.P$87 U1.P$88 U1.P$89 U1.P$90 U1.P$86 | U1.P$83 U1.P$84 U1.P$85 U1.P$86
  Bottom 0.305: v14.63,3.93 13.65,4.91 13.65,11.6 14.1,12.05 15.74,12.05 | 17.93,14.24 15.74,12.05 | v21.26,18.03 21.26,17.57 v17.95,14.26 17.93,14.24 | 17.93,14.24 16.63,15.54 v14.43,15.54 13.94,15.05 v9.55,15.05 | v28.15,15.45 28.15,15.85 25,19 v25,21.8 | 17.93,14.24 19.96,14.24 20.14,14.06 v20.19,14.06 | v19,10.46 17.41,12.05 15.74,12.05 | v39.68,18.45 39.68,20.9 v38.98,21.6
  pour Top: 20.56,1.86 20.58,1.88 25.42,1.88 25.44,1.86 25.46,1.84 25.48,1.82 25.48,0.08 31.52,0.08 31.52,1.92 31.54,1.94 31.56,1.96 31.58,1.98 36.37,1.98 36.39,1.96 36.41,1.94 36.43,1.92 36.43,0.13 39.4,0.08 40.09,0.11 40.78,0.23 41.44,0.44 42.07,0.74 42.66,1.11 43.32,1.65 43.93,2.24 44.48,2.89 44.96,3.59 45.38,4.33 45.61,4.87 45.79,5.42 45.89,5.99 45.94,6.56 45.92,7.13 45.92,7.13 45.92,7.15 45.92,7.16 45.92,7.16 45.92,28.4 45.89,29.04 45.78,29.68 45.61,30.3 45.37,30.9 45.07,31.47 44.71,32.01 44.29,32.5 43.7,33.06 43.06,33.57 42.37,34.01 41.64,34.38 40.88,34.68 39.89,34.87 39.25,34.92 6.66,34.92 5.61,34.77 5,34.65 4.41,34.47 3.85,34.22 3.31,33.91 2.82,33.54 2.36,33.12 1.51,32.17 0.74,31.14 0.08,30.06 0.08,24.48 7.02,24.48 7.04,24.46 7.06,24.44 7.08,24.42 7.08,10.58 7.06,10.56 7.04,10.54 7.02,10.52 0.08,10.52 0.08,6.22 0.08,6.22 0.08,6.22 0.08,6.22 0.09,6.21 0.1,6.2 0.11,6.2 0.11,6.2 0.11,6.19 0.12,6.18 0.12,6.18 0.12,6.18 0.12,6.16 0.13,6.15 0.13,6.15 0.37,4.87 1.11,3.29 2.5,1.71 4.28,0.62 6.31,0.13 9.52,0.08 9.52,1.72 9.54,1.74 9.56,1.76 9.58,1.78 14.42,1.78 14.44,1.76 14.46,1.74 14.48,1.72 14.48,0.13 20.52,0.08 20.52,1.82 20.54,1.84
HAPTIC_EN  (via drill 0.3)
  Top 0.15: U1.P$U1 29.97,17.81 29.87,17.71 28.08,17.71 v27.62,18.17
  Top 0.152: v14.95,18.55 14.95,18.66 IC4.A1
  Route2 0.15: v14.95,18.55 15.05,18.65 21.7,18.65 22.18,18.17 v27.62,18.17
IMU_INT1  (via drill 0.3 pad 0.25)
  Top 0.15: IC3.5 23.33,18.67 v23.64,18.98 | U1.P$N1 30.52,18.81 30.39,18.94 28.86,18.94 v28.42,18.49
  Route15 0.15: v23.64,18.98 27.92,18.98 v28.42,18.49
IMU_INT2  (via drill 0.2 layers 1-2, 0.3 layers 1-2)
  Top 0.15: IC3.6 22.83,18.73 v22.57,18.99 | U1.P$P2 v31.09,18.52 v31.08,18.51
  Route2 0.15: v22.57,18.99 23.56,19.98 28.17,19.98 29.2,18.95 30.64,18.95 v31.08,18.51
LX1
  Top 0.152: IC2.B2 IC2.B3 17.45,6.01 L7.1
LX2
  Top 0.152: IC2.D2 IC2.D3 16.65,6.05 L7.2
MOSI  (via drill 0.25 pad 0.25 layers 1-2, 0.3, 0.3 pad 0.25)
  Top 0.15: v8.91,16.45 9.23,16.77 J1.14 | U1.P$B13 33.84,21.82 v33.86,21.84
  Route2 0.15: v33.86,21.84 33.76,21.84 v31.15,24.45
  Route15 0.15: v8.91,16.45 8.35,16.45 7.7,17.1 7.7,20.75 11.4,24.45 v31.15,24.45
N$1
  Top 0.152: IC2.D1 16.63,8.1 R4.2
N$2
  Top 0.152: IC1.D1 15.85,12.03 R9.2
N$3
  Top 0.152: IC2.E1 16.1,8.23 R2.2
N$4
  Top 0.15: XC1.1 39.59,25.73 38.64,25.73 | X1.1 38.64,25.73 | U1.P$B24 37.09,21.91 37.31,22.13 37.31,24.4 38.64,25.73
N$5
  Top 0.15: U1.P$A23 36.59,26.4 X1.3 37.36,28.3 XC2.1
N$6  (via drill 0.3 pad 0.25 layers 1-2)
  Top 0.15: U1.P$B5 31.37,22.28 L3.2 32.02,23.05 C16.1 32.3,23.3 v33.2,24.2 | v39.85,23.95 C10.1
  Top 0.152: C10.1 C15.1 39.14,22.53 38.08,21.47 37.6,21.47 37.09,20.96 U1.P$E24
  Route2 0.15: v33.2,24.2 33.84,23.55 39.45,23.55 v39.85,23.95
N$7
  Top 0.152: IC3.1 23.88,16.73 R1.2
N$8
  Top 0.15: L2.2 L3.1
N$9
  Top 0.15: U1.P$A18 35.08,22.32 C13.1
N$10
  Top 0.15: U1.P$B3 30.63,22.52 L2.1
N$12
  Top 0.152: C32.2 IC4.A2
N$13
  Top 0.15: U1.P$C1 30.04,21.31 C5.1
N$14
  Top 0.152: J1.18 10.79,14.92 11.08,14.92 11.74,15.58 11.74,16.41 12.07,16.74 12.07,17.24 12.41,17.59 EPD_C6.2
N$15
  Top 0.152: U1.P$N24 37.3,18.81 37.31,18.8 37.42,18.8 C9.1
N$16
  Top 0.15: U1.P$D2 30.77,21.06 30.71,21.01 29.39,21.01 28.43,21.97 X2.1 C17.2
N$17
  Top 0.15: U1.P$F2 30.77,20.56 30.71,20.61 29.86,20.61 28.65,19.4 27.41,19.4 X2.2 C18.2
N$18
  Top 0.152: C20.1 30.77,16.45 30.96,16.26 31.22,16.26 31.27,16.31 U1.P$AC5
N$19
  Top 0.152: L1.1 C3.1 37.57,20.75 36.97,20.16 | 36.92,20.16 36.74,20.16 36.64,20.06 U1.P$H23 | 36.97,20.16 36.92,20.16 | 36.92,20.16 36.97,20.16
N$20
  Top 0.152: J1.24 11.14,11.27 11.8,11.27 12.47,10.6 EPD_C12.2
N$21
  Top 0.152: J1.4 12.35,21.77 EPD_C2.2
N$22
  Top 0.152: C11.1 37.52,21.82 37.22,21.51 37.04,21.51 U1.P$D23
N$23
  Top 0.152: R2_USB.1 21.22,28.88 J4.B5
N$24
  Top 0.152: R1_USB.2 24.21,28.87 J4.A5
N$25
  Top 0.152: EPD_C1.2 11.18,21.02 11.08,21.12 10.79,21.12 J1.5
N$27
  Top 0.152: J1.22 10.79,12.62 12.35,12.62 EPD_C10.2
N$29
  Top 0.152: J1.20 11.24,13.77 EPD_C8.2
N$30
  Top 0.152: EPD_C7.2 12.67,16.24 12.02,15.58 12.02,15.36 10.93,14.27 J1.19
N$31
  Top 0.15: R1_EP_DR.1 13.87,23.62 R_TYPE_SEL.2 14.47,23.62 SJ1.2
N$33  (via drill 0.3)
  Top 0.152: L5.1 6.87,7.53 C2-EP-DR.1 5.07,8.28 D5.2 | D5.2 | Q1.3 13.36,26.87 v12.65,26.87 | v5.1,9.97 5.1,9.18 D5.2
  Route15 0.152: v12.65,26.87 7.35,21.57 7.35,10.45 7.15,10.25 5.38,10.25 v5.1,9.97
N$34
  Top 0.152: C2-EP-DR.2 5.18,5.89 D2.1 5.82,4.61 D4.2
P0.13  (via drill 0.3)
  Top 0.15: U1.P$AD8 32.14,15.36 32.14,14.33 31.69,13.88 v31.69,13.56
  Top 0.152: C30.2 8.92,1.85 R5.1 9.41,3 9.41,3.29 10.14,4.03 SW_UP.2 9.67,4.03 v9.4,4.3
  Bottom 0.15: v9.4,4.3 10.29,3.41 10.76,3.41 10.87,3.3 13.11,3.3 13.22,3.41 16.82,3.41 18.89,5.48 23.29,5.48 31.37,13.56 v31.69,13.56
P0.14  (via drill 0.2 layers 1-2, 0.3)
  Top 0.15: v32.48,16.27 32.52,16.31 U1.P$AC9 | v20.75,4.64 20.55,4.45 R8.1
  Top 0.152: R8.1 C31.2 21.34,3.78 SW_ENT.2
  Route2 0.15: v32.48,16.27 31.51,16.27 20.75,5.51 v20.75,4.64
P0.20  (via drill 0.3)
  Top 0.15: U1.P$AD16 34.59,15.51 34.98,15.12 v34.98,15.07
P1.01  (via drill 0.2 pad 0.25 layers 1-2, 0.3, 0.3 pad 0.25)
  Top 0.15: v36.6,16.55 v36.59,16.56 U1.P$Y23
  Top 0.152: R_PWR_EPD.1 16.43,0.98 DMG2305UX-7.1 15.51,1.19 v15.25,1.45
  Route2 0.15: v36.6,16.55 36.6,16.09 36.68,16.02 36.68,15.62 v37.3,15
  Bottom 0.15: v15.25,1.45 19,5.2 27.5,5.2 v37.3,15
P1.02  (via drill 0.3)
  Top 0.152: R7.1 C29.2 | R7.1 31.41,2.74 31.41,3.29 31.52,3.41 31.97,3.41 SW_DN.2 | U1.P$W24 37.72,17.31 v37.75,17.28 | R7.1 30.79,2.57 30.79,2.61 30.67,2.73 29.8,2.73 29.23,2.16 v29.05,2.16
  Bottom 0.15: v37.75,17.28 37.75,14.81 27.35,4.41 27.35,3.86 v29.05,2.16
P1.09  (via drill 0.3)
  Top 0.15: v29.69,18.14 29.73,18.18 30.46,18.18 U1.P$R1
  Top 0.152: U1.P$L24 37.2,19.31 37.42,19.08 38.04,19.08 38.57,18.55 v38.65,18.55
  Route15 0.152: v29.69,18.14 29.69,16.29 29,15.6 29,14.9 29.9,14 31.35,14 31.9,14.55 33.45,14.55 33.95,14.05 37.45,14.05 39,15.6 39,18.2 v38.65,18.55
PMIC_INT  (via drill 0.2 layers 1-2, 0.3, 0.3 pad 0.25)
  Top 0.152: U1.P$T2 31.09,17.73 v31.09,17.68
  Top 0.305: IC1.A1 17.36,12.24 v17.36,12.67
  Route2 0.15: v25.34,16.01 26.66,17.32 30.69,17.32 31.04,17.68 v31.09,17.68
  Bottom 0.15: v25.34,16.01 22.29,12.95 17.64,12.95 v17.36,12.67
PREGVH  (via drill 0.3)
  Top 0.152: D5.1 1.57,8.27 v1.45,8.15 | v9.7,13.25 9.72,13.27 J1.21 11.82,13.27 EPD_C9.2
  Route15 0.152: v9.7,13.25 7.63,11.18 7.63,10.34 5.44,8.15 v1.45,8.15
PREVGL  (via drill 0.3)
  Top 0.152: D2.2 0.8,6.13 v0.8,6.9 | v9.7,12.25 9.72,12.27 J1.23 10.79,12.12 11.08,12.12 11.63,11.57 EPD_C11.2
  Route15 0.152: v9.7,12.25 7.91,10.46 7.91,10.22 4.59,6.9 v0.8,6.9
RESE
  Top 0.152: J1.3 10.79,22.42 11.92,22.42 12.68,23.18 R1_EP_DR.2 12.88,23.22 13.12,23.46 13.12,23.78 Q1.2
RESET  (via drill 0.2 layers 1-2, 0.3, 0.35 layers 1-2)
  Top 0.15: U1.P$AC13 v33.85,16.3 | J2.6 40.78,11.63 v39.64,12.77 | v36.2,13.75 35.47,13.02 TP_RESET.TP
  Route2 0.15: v33.85,16.3 36,16.3 36.4,15.9 36.4,14.95 37.2,14.15 38.26,14.15 v39.64,12.77 37.18,12.77 v36.2,13.75
RF
  Top 0.152: L1.2 C4.1 C22.1 40.95,20.25 ANT1.1
SCK  (via drill 0.3, 0.3 pad 0.25)
  Top 0.15: v33.55,23 33.55,22.35 U1.P$A12 | J1.13 10.62,17.25 v8.45,17.25
  Route15 0.15: v8.45,17.25 8.35,17.35 8.35,20.25 11.1,23 v33.55,23
SCL  (via drill 0.2 layers 1-2, 0.3 pad 0.25)
  Top 0.15: U1.P$M2 v31.09,19.08
  Top 0.152: IC1.B1 16.7,12.95 17.25,13.5 17.8,13.5 | R4.1 17.32,9.37 18.2,10.25 18.2,13.11 17.8,13.5 | IC3.12 23.33,16.62 22.85,16.13 R17.2 22.19,15.46 v22.2,15.45 | U3.7 16.39,17.33 16.39,17.71 16.79,18.1 16.94,18.1 | 17.8,13.5 18.05,13.5 18.78,14.22 18.78,14.55 | 18.78,14.55 18.78,17.63 18.31,18.09 18.01,18.09 18,18.1 16.94,18.1 | IC4.C1 16.48,18.55 16.94,18.1 | 18.78,14.55 19.15,14.55 v19.65,15.05 | TP_SCL.TP 20.12,20.64 v21.34,20.64
  Route2 0.152: v21.34,20.64 29.36,20.64 30.94,19.07 31.08,19.07 v31.09,19.08
  Bottom 0.152: v19.65,15.05 20.05,15.45 v22.2,15.45 22.2,18.09 21.34,18.95 v21.34,20.64
SDA  (via drill 0.2 layers 1-2, 0.3, 0.3 pad 0.25, 0.35 pad 0.5)
  Top 0.15: v29.71,19.51 30.39,19.51 U1.P$L1
  Top 0.152: R2.1 15.73,9.37 14.5,10.6 14.5,12.2 | 14.5,12.2 14.7,12.4 15.91,12.4 16.3,12.01 IC1.C1 | 14.5,12.2 14.5,14.65 15,15.15 | U3.8 15.64,17.55 15.25,17.55 15.1,17.4 15.1,15.35 15,15.25 15,15.15 | IC3.2 24.41,17.25 R18.2 24.69,16.96 v24.69,16.65 24.69,14.47 TP_SDA.TP | v15,14.45 15,15.15 | IC4.B2
  Route2 0.152: v14.55,17.15 14.35,17.35 14.35,19.15 14.89,19.69 IC4.B2
  Route15 0.152: v29.71,19.51 28.98,18.78 28.98,17.58 28.05,16.65 v24.69,16.65 18.55,16.65 16.34,14.45 v15,14.45 15,16.7 v14.55,17.15
  other vias: 15.98,19.69
SWDCLK
  Top 0.15: J2.4 40.69,10.36 39.82,9.49 38.58,9.49 37.7,10.37 37.7,10.67 | 37.7,10.67 37.7,11.7 39.25,13.25 39.25,16.15 38.59,16.81 U1.P$AA24 | 37.7,10.67 37.44,10.41 37.44,8.99 37.4,8.95
  Top 0.152: 37.4,8.95 TP_SWDCLK.TP
SWDIO
  Top 0.15: J2.2 40.7,8.68 40.7,7.2 39.82,6.32 36.2,6.32 35.21,7.31 35.21,11.35 35.21,11.46 38.95,15.2 38.95,16 38.64,16.31 U1.P$AC24
  Top 0.152: TP_SWDIO.TP 35.74,10.82 35.21,11.35
SWO  (via drill 0.3 pad 0.25 layers 1-2, 0.35 layers 1-2)
  Top 0.15: U1.P$AD22 36.09,15.39 v35.84,15.15 | v33.1,12.7 33.1,11.69 TP_SWO.TP
  Route2 0.15: v35.84,15.15 33.4,12.7 v33.1,12.7
VBAT  (via drill 0.3, 0.35 layers 1-2)
  Top 0.152: IC1.C2 16.3,11.55 15.9,11.15
  Top 0.305: v15.67,10.4 15.67,10.92 15.9,11.15 | C37.2 16.37,13.59 C27.2 16.37,15.33 U3.2 U3.3 16.88,14.44 v17.07,14.25 | TP_VBAT.TP 23.75,7.94 23.75,9.59 22.24,11.1 20.56,11.1 v19.3,12.36
  Route2 0.305: v15.67,10.4 15.67,12.85 v17.07,14.25 18.07,13.25 18.2,13.25 19.09,12.36 v19.3,12.36
VBUS  (via drill 0.3, 0.35)
  Top 0.152: 17.4,11.28 IC1.A2
  Top 0.305: 24.12,24.95 C42.1 C43.1 25.39,27.27 J4.A4_B9 25.39,29.37 24.26,30.5 21.72,30.5 20.81,29.59 20.81,29.12 J4.A9_B4 | 24.12,24.95 23.35,24.95 22.63,24.23 D3.5 | U1.P$AD2 30.4,15.81 29.75,15.15 | C21.1 29.64,14.29 | 29.75,15.15 29.75,14.29 29.64,14.29 | C38.2 28.86,14.29 29.64,14.29 | v25.6,23.75 24.4,24.95 24.12,24.95 | 29.75,15.15 v29.68,15.22 | v17.4,10.4 17.4,11.28
  Route2 0.305: v29.68,15.22 25.96,11.5 18.5,11.5 v17.4,10.4
  Bottom 0.305: v25.6,23.75 25.6,19.3 v29.68,15.22
VREG  (via drill 0.3, 0.35)
  Top 0.152: IC2.A1 IC2.A2 IC2.A3 | 16.7,11.05 IC1.B2
  Top 0.305: v16.55,10.4 16.55,10.9 16.7,11.05 | v18,9.15 18.96,8.19 C39.1 | C39.1 18.73,7.68 IC2.A2 | C39.1 20.27,8.19 C24.2 20.34,8.18 C23.2 | TP_VREG.TP 22.79,9.36 v22.45,9.7
  Route2 0.305: v16.55,10.4 16.55,9.85 17.25,9.15 v18,9.15
  Route15 0.305: v18,9.15 18.55,9.7 v22.45,9.7
(copper drawn outside any net)
  shapes: Top area x1